# Altium PCB PCB.PcbDoc
Units mil, origin at the board's own origin, x right, y up, seen from the top; angles counter-clockwise.
Board outline 1729.33 x 890.25 mil, 2 copper layers (Top Layer, Bottom Layer); 14 components, 15 nets, 45 pads, 0 vias.
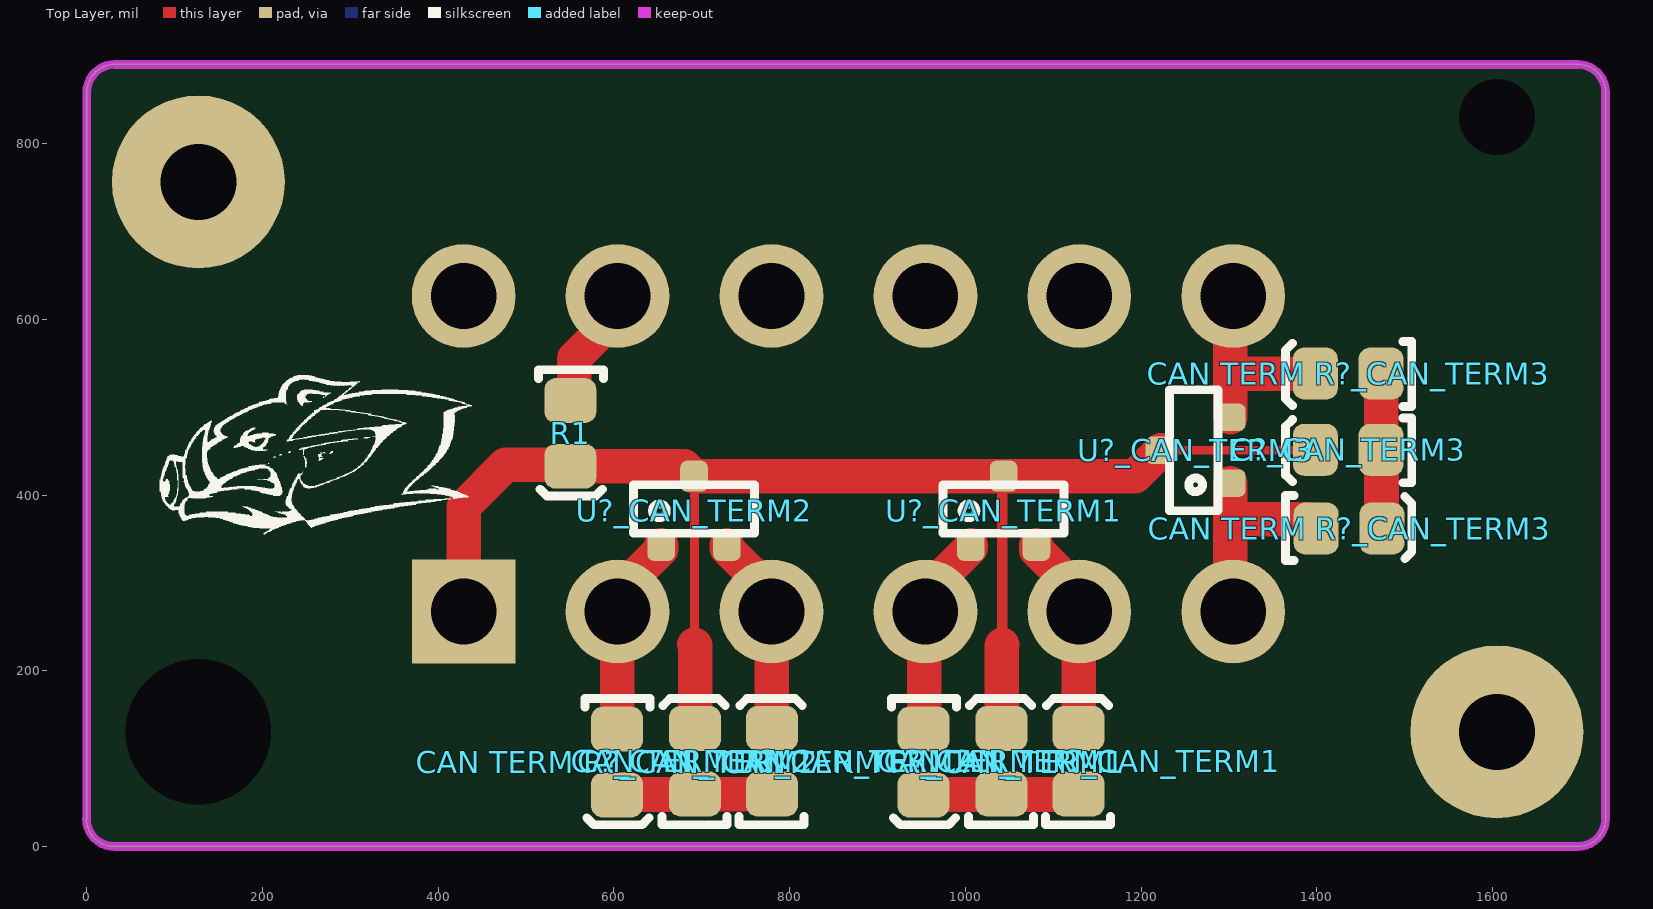
[diagram p0: Top Layer view]
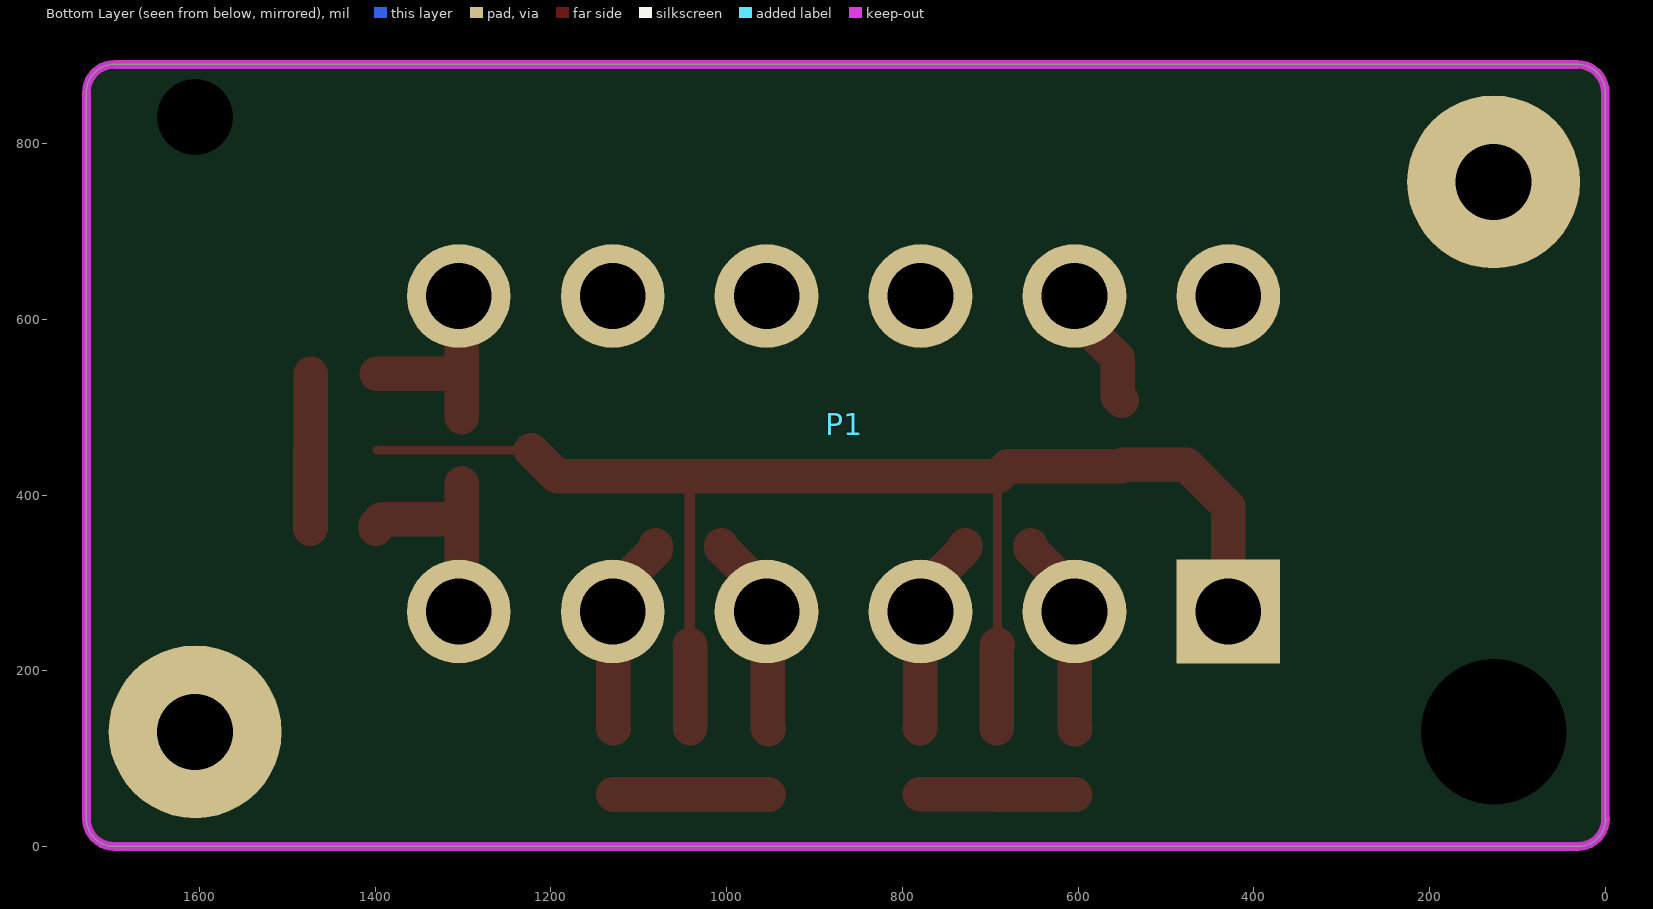
[diagram p1: Bottom Layer view, seen from below]
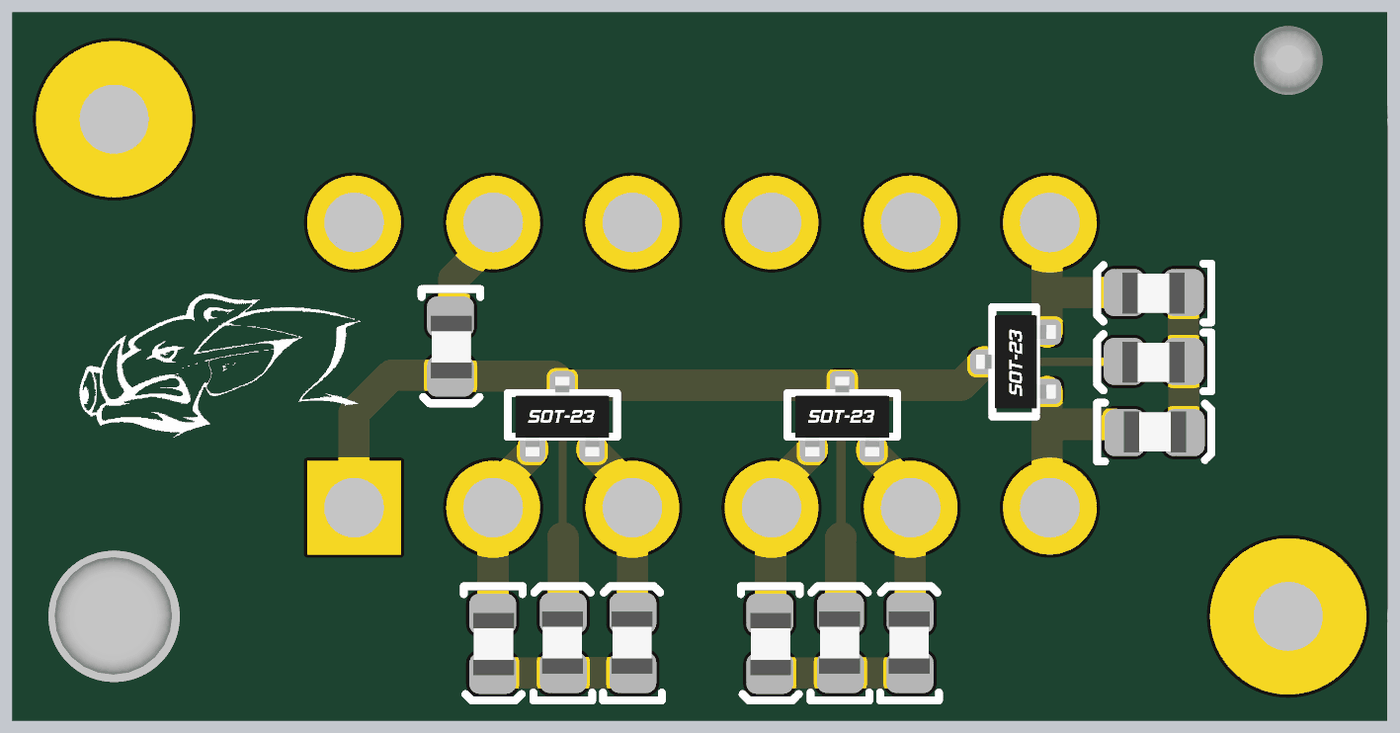
[diagram p2: 3D render of the assembled board from above, using the file's embedded part models]

## Layer stack, top to bottom
Top Solder: solder mask 0.4, Solder Resist, Dk 3.5
Top Layer: signal copper 1.4
Dielectric 1: dielectric 12.6, FR-4, Dk 4.8
Bottom Layer: signal copper 1.4
Bottom Solder: solder mask 0.4, Solder Resist, Dk 3.5

## Board outline
31.25,0 cw(c31.25,31.74) -0.49,31.74 0,31.25 0,858.51 cw(c31.74,858.51) 31.74,890.25 1697.1,890.25 cw(c1697.1,858.51) 1728.84,858.51 1728.84,31.74 cw(c1697.1,31.74) 1697.1,0

## Design rules (kind name [scope] priority, off if disabled: settings)
Clearance [All] p1: gap=10 ignorepadtopadclearanceinfootprint=FALSE except(0: Arc-Hole Track-Hole SMDPad-Hole THPad-Hole Via-Hole Fill-Hole Poly-Hole Region-Hole Text-Hole)
Height [All] p1: minheight=0 maxheight=10000 prefheight=500
PolygonConnect [All] p1: connectstyle=Relief reliefconductorwidth=10 reliefentries=4 polygonreliefangle="90 Angle" airgapwidth=10
RoutingVias [All] p1: holewidth=28 width=50 viastyle="Through Hole" minholewidth=28 minwidth=50 maxholewidth=28 maxwidth=50
SolderMaskExpansion [All] p1: expansion=4 istentingtop=FALSE
Width [All] p1: maxlimit=196.85 minlimit=10 preferedwidth=39.37 minimp=50.000000 maximp=50.000000 favimp=50.000000
29 further rules are at their usual default settings.

## Classes and differential pairs
channel class Termination: CAN_TERM1 CAN_TERM2 CAN_TERM3
component class Top_Level: P1 R1
component class CAN_TERM3: C?_CAN_TERM3 "CAN TERM R?_CAN_TERM3"
component class CAN_TERM2: C?_CAN_TERM2 "CAN TERM R?_CAN_TERM2" U?_CAN_TERM2
component class CAN_TERM1: C?_CAN_TERM1 "CAN TERM R?_CAN_TERM1" U?_CAN_TERM1

## Components (designator, comment, footprint, x,y, rotation, side; value= is the part's Value field where it differs from the comment)
C?_CAN_TERM1 "22nF" 0805 1040.2,97.51 r90 top (schematic designator C?)
C?_CAN_TERM2 "22nF" 0805 691.33,97.51 r90 top (schematic designator C?)
C?_CAN_TERM3 "22nF" 0805 1435.35,450.48 r180 top (schematic designator C?)
"CAN TERM R?_CAN_TERM1" "56R" 0805 1127.8,97.51 r90 top (schematic designator "CAN TERM R?")
"CAN TERM R?_CAN_TERM1" "56R" 0805 953.43,95.6 r270 top (schematic designator "CAN TERM R?")
"CAN TERM R?_CAN_TERM2" "56R" 0805 604.56,95.6 r270 top (schematic designator "CAN TERM R?")
"CAN TERM R?_CAN_TERM2" "56R" 0805 778.93,97.51 r90 top (schematic designator "CAN TERM R?")
"CAN TERM R?_CAN_TERM3" "56R" 0805 1435.35,537.25 r180 top (schematic designator "CAN TERM R?")
"CAN TERM R?_CAN_TERM3" "56R" 0805 1437.25,362.88 r0 top (schematic designator "CAN TERM R?")
P1 "DTF15-12P" DTF15-12P 428.95,985.52 r0 bottom locked
R1 "0R" 0805 551.43,469.73 r270 top
U?_CAN_TERM1 "NUP2105L" "ON SOT-23" 1043.55,382.13 r0 top (schematic designator U?)
U?_CAN_TERM2 "NUP2105L" "ON SOT-23" 691.19,382.13 r0 top (schematic designator U?)
U?_CAN_TERM3 "NUP2105L" "ON SOT-23" 1262.06,451.03 r90 top (schematic designator U?)

## Footprints (in the part's own frame and the unit in brackets; to place one, negate y for a bottom-side part, rotate by r counter-clockwise, add the part's x,y. Pads: shape width x height; smd on the part's side, far side on the other; paste and mask are expansions set on the pad)
0805 [mil]
  rrect50% 51.18x59.06 smd: 1(-37.87,-1.03) 2(36.93,-1.03)
  silkscreen extent -73,-37 71,37, body extent -39,-26 39,26, height 29
DTF15-12P [mm]
  rect 3x3 hole 1.9: 1(0,18.24)
  round 3 hole 1.9: 2(4.45,18.24) 3(8.9,18.24) 4(13.35,18.24) 5(17.8,18.24) 6(22.25,18.24) 7(22.25,9.12) 8(17.8,9.12) 9(13.35,9.12) 10(8.9,9.12) 11(4.45,9.12) 12(0,9.12)
  round 1.524 hole 4.2 unplated mask+0: 5(-7.671,21.717)
  round 1.524 hole 2.2 unplated mask+0: 5(29.87,3.937)
  body extent -10.87,2.62 33.07,24.88, height 35
"ON SOT-23" [mm] "NUP2105L"
  rrect50% 0.8x0.9 smd: 1(-0.95,-1) 2(0.95,-1) 3(0,1)
  silkscreen extent -1.75,-0.65 1.75,0.75, body extent -1.5,-1.28 1.5,1.27, height 1

## Part data
C?_CAN_TERM1 C?_CAN_TERM2 C?_CAN_TERM3: library part GCM21B5C1H223JA16L, Digikey Part Number=490-5318-1-ND, Manufacturer=muRata, Rated Voltage=50V, Tolerance=±5%, Material="C0G, NP0", Part Number=GCM21B5C1H223JA16L
"CAN TERM R?_CAN_TERM1" "CAN TERM R?_CAN_TERM1" "CAN TERM R?_CAN_TERM2" "CAN TERM R?_CAN_TERM2" "CAN TERM R?_CAN_TERM3" "CAN TERM R?_CAN_TERM3": library part RC0805FR0756RL, Digikey Part Number=311-56.0CRCT-ND, Manufacturer=YAGEO, Rated Voltage=0.125W, Tolerance=0.01, Material=FR-07, Part Number=RC0805FR0756RL
P1: library part DTF15-12P[[/\]]DTF15-12P, Digikey Part Number=1734-1647-ND, Angle=0, Contact="Copper Alloy", Digikey Link=https://www.digikey.com.au/product-detail/en/te-connectivity-deutsch-connectors/DTF15-12PA/1734-1647-ND/7220164, Flange=No, Part Number=DTF15-12P, Pitch=4.44mm, Positions=12, Row Spacing="9.12 mm"
R1: library part RC0805FR070RL, "DNP", Digikey Part Number=311-0.0CRCT-ND, Manufacturer=YAGEO, Rated Voltage=0.125W, Tolerance=0.01, Material=FR-07, Part Number=RC0805FR070RL
U?_CAN_TERM1 U?_CAN_TERM2 U?_CAN_TERM3: "Dual Line CAN Bus Protector", Digikey Part Number=NUP2105LT1GOSCT-ND, Manufacturer="ON Semiconductor", Digikey Link=https://www.digikey.com/product-detail/en/on-semiconductor/NUP2105LT1G/NUP2105LT1GOSCT-ND/1485001, Part Number=NUP2105L

## Free pads (board coordinates)
  round 196.85 hole 86.61: 2(126.95,756.5) 2(1604.95,130.52)

## Nets (pads, with @x,y where several pads share a name; then routed paths per layer and width w, separated by ;. In a path a pad name is that pad's centre, name@x,y a point inside that pad or via, vN(x,y) a via of type N, cw(c..) or ccw(c..) an arc to the next point about the centre after c; other vN are vias at no path point)
5kW: P1.8
CAN1H: "CAN TERM R?_CAN_TERM1.2"@1128.83,134.43 P1.5@1129.73,267.41 U?_CAN_TERM1.2 | length 228.9
  Top Layer w39.37: U?_CAN_TERM1.2 1080.95,337.5 1129.73,288.72 1129.73,267.41 1129.28,266.96 1129.28,134.88 1128.83,134.43
CAN1L: "CAN TERM R?_CAN_TERM1.1"@952.4,133.47 P1.4 U?_CAN_TERM1.1 | length 231.6
  Top Layer w39.37: 952.4,133.47 953.47,134.54 953.47,266.34 P1.4 954.54,288.72 1006.15,340.33 U?_CAN_TERM1.1
CAN2H: "CAN TERM R?_CAN_TERM2.2"@779.96,134.43 P1.3 U?_CAN_TERM2.2 | length 229.6
  Top Layer w39.37: U?_CAN_TERM2.2 728.59,339.47 779.34,288.72 P1.3 779.65,267.1 779.65,134.74 779.96,134.43
CAN2L: "CAN TERM R?_CAN_TERM2.1"@603.52,133.47 P1.2 U?_CAN_TERM2.1 | length 230.1
  Top Layer w39.37: 603.52,133.47 603.83,133.78 603.83,267.1 P1.2 604.14,288.72 653.79,338.36 U?_CAN_TERM2.1
CAN3H: "CAN TERM R?_CAN_TERM3.2"@1398.42,538.28 P1.7 U?_CAN_TERM3.2 | length 237
  Top Layer w39.37: U?_CAN_TERM3.2 1301.43,539.62 ; P1.7 1301.43,622.96 1301.43,539.62 ; 1398.42,538.28 1302.76,538.28 1301.43,539.62
CAN3L: "CAN TERM R?_CAN_TERM3.1"@1399.38,361.85 P1.6 U?_CAN_TERM3.1 | length 252.3
  Top Layer w39.37: U?_CAN_TERM3.1 1301.43,372.29 ; P1.6 1301.43,270.91 1301.43,372.29 ; 1399.38,361.85 1399.38,365.79 1393.48,371.7 1389.54,371.7 1388.94,372.29 1301.43,372.29
CANS: C?_CAN_TERM1.2 C?_CAN_TERM2.2 C?_CAN_TERM3.2 P1.1 R1.2 U?_CAN_TERM1.3 U?_CAN_TERM2.3 U?_CAN_TERM3.3 | length 1703.4
  Top Layer w10: C?_CAN_TERM2.2@691.19,135.6 C?_CAN_TERM2.2 ; U?_CAN_TERM2.3 691.74,420.95 691.74,229.51 ; U?_CAN_TERM3.3 1397.94,451.03 C?_CAN_TERM3.2
  Top Layer w11.81: 1042.13,229.51 1042.13,420.09 U?_CAN_TERM1.3
  Top Layer w39.37: P1.1 428.95,386.62 476.62,434.3 548.9,434.3 R1.2 679.89,432.81 U?_CAN_TERM2.3 U?_CAN_TERM1.3 1193.16,421.5 U?_CAN_TERM3.3 ; 691.74,229.51 692.36,228.89 C?_CAN_TERM2.2 ; C?_CAN_TERM1.2 1041.24,228.61 1042.13,229.51
GLV+: P1.12
GLV-: P1.11 R1.1 | length 141.1
  Top Layer w39.37: R1.1 554.69,511.9 554.69,555.71 604.14,605.16 P1.11
"Green In": P1.10
"Green Out": P1.9
NetC?_CAN_TERM1_1: "CAN TERM R?_CAN_TERM1.1"@1128.83,59.63 "CAN TERM R?_CAN_TERM1.2"@952.4,58.67 C?_CAN_TERM1.1 | length 176.8
  Top Layer w39.37: 952.4,58.67 952.88,59.15 1128.35,59.15 1128.83,59.63
NetC?_CAN_TERM2_1: "CAN TERM R?_CAN_TERM2.1"@779.96,59.63 "CAN TERM R?_CAN_TERM2.2"@603.52,58.67 C?_CAN_TERM2.1 | length 176.8
  Top Layer w39.37: 603.52,58.67 604.01,59.15 691.88,59.15 C?_CAN_TERM2.1 779.96,59.63
NetC?_CAN_TERM3_1: "CAN TERM R?_CAN_TERM3.1"@1473.22,538.28 "CAN TERM R?_CAN_TERM3.2"@1474.18,361.85 C?_CAN_TERM3.1 | length 176.8
  Top Layer w39.37: 1473.22,538.28 C?_CAN_TERM3.1 1473.7,451.03 1473.7,362.33 1474.18,361.85
pads on no net: P1.5@126.95,130.52 P1.5@1604.95,830.52

## Keep-outs
Keep-Out Layer:
  lines w10: -0.49,31.74 ccw(c31.25,31.74) 31.25,0 1697.1,0 ccw(c1697.1,31.74) 1728.84,31.74 1728.84,858.51 ccw(c1697.1,858.51) 1697.1,890.25 31.74,890.25 ccw(c31.74,858.51) 0,858.51 0,31.25

## Silkscreen, mask and mechanical layers (free items; w line width, h text height)
Top Overlay:
  drawing of 19 lines, arcs and shapes, not listed
Drill Drawing:
  circle w10: c197.19,3151.52 r22.44
  lines w10: 174.75,2826.16 219.63,2826.16 219.63,2871.03 174.75,2871.03 174.75,2826.16 ; 174.75,2927.13 197.19,2938.35 219.63,2927.13 208.41,2949.57 219.63,2972.01 197.19,2960.79 174.75,2972.01 185.97,2949.57 174.75,2927.13 ; 174.75,3072.98 219.63,3072.98 197.19,3028.11 174.75,3072.98
  lines w15: 133.48,2795.87 7460.24,2795.87 ; 133.48,3199.76 7460.24,3199.76 ; 514.77,2694.89 514.77,3300.73 ; 877.99,2694.89 877.99,3300.73 ; 1658.43,2694.89 1658.43,3300.73 ; 2009.42,2694.89 2009.42,3300.73 ; 2513.85,2694.89 2513.85,3300.73 ; 3529.82,2694.89 3529.82,3300.73 ; 3937.34,2694.89 3937.34,3300.73 ; 4449.84,2694.89 4449.84,3300.73 ; 5028.4,2694.89 5028.4,3300.73 ; 5613.57,2694.89 5613.57,3300.73 ; 6521.76,2694.89 6521.76,3300.73 ; 133.48,2694.89 7460.24,2694.89 7460.24,3300.73 133.48,3300.73 133.48,2694.89
  text "Symbol" at 194.07,3230.05 h48.47
  text "Count" at 545.06,3230.05 h48.47
  text "Hole Size" at 908.28,3230.05 h48.47
  text "Plated" at 1688.72,3230.05 h48.47
  text "Hole Type" at 2039.72,3230.05 h48.47
  text "Drill Layer Pair" at 2544.14,3230.05 h48.47
  text "Via/Pad" at 3560.11,3230.05 h48.47
  text "Pad Shape" at 3967.63,3230.05 h48.47
  text "Template" at 4480.13,3230.05 h48.47
  text "Description" at 5058.69,3230.05 h48.47
  text "Hole Tolerance (+)" at 5643.87,3230.05 h48.47
  text "Hole Tolerance (-)" at 6552.05,3230.05 h48.47
  text "1" at 545.06,3129.08 h40.39
  text "86.61mil (2.200mm)" at 908.28,3129.08 h40.39
  text "NPTH" at 1688.72,3129.08 h40.39
  text "Round" at 2039.72,3129.08 h40.39
  text "Top Layer - Bottom Layer" at 2544.14,3129.08 h40.39
  text "Pad" at 3560.11,3129.08 h40.39
  text "Rounded" at 3967.63,3129.08 h40.39
  text "c152hn220m152" at 4480.13,3129.08 h40.39
  text "1" at 545.06,3028.11 h40.39
  text "165.35mil (4.200mm)" at 908.28,3028.11 h40.39
  text "NPTH" at 1688.72,3028.11 h40.39
  text "Round" at 2039.72,3028.11 h40.39
  text "Top Layer - Bottom Layer" at 2544.14,3028.11 h40.39
  text "Pad" at 3560.11,3028.11 h40.39
  text "Rounded" at 3967.63,3028.11 h40.39
  text "c152hn420m152" at 4480.13,3028.11 h40.39
  text "2" at 545.06,2927.13 h40.39
  text "86.61mil (2.200mm)" at 908.28,2927.13 h40.39
  text "PTH" at 1688.72,2927.13 h40.39
  text "Round" at 2039.72,2927.13 h40.39
  text "Top Layer - Bottom Layer" at 2544.14,2927.13 h40.39
  text "Pad" at 3560.11,2927.13 h40.39
  text "Rounded" at 3967.63,2927.13 h40.39
  text "c500h220" at 4480.13,2927.13 h40.39
  text "12" at 545.06,2826.16 h40.39
  text "74.80mil (1.900mm)" at 908.28,2826.16 h40.39
  text "PTH" at 1688.72,2826.16 h40.39
  text "Round" at 2039.72,2826.16 h40.39
  text "Top Layer - Bottom Layer" at 2544.14,2826.16 h40.39
  text "Pad" at 3560.11,2826.16 h40.39
  text "(Mixed)" at 3967.63,2826.16 h40.39
  text "(Mixed)" at 4480.13,2826.16 h40.39
  text "16 Total" at 545.06,2725.18 h40.39
  text "FABRICATION NOTES" at 2249.06,2417.75 h118.11
  text "1. QUANTITY: 5" at 2249.06,2217.11 h118.11
  text "2. SIZE:  22.61mm x 43.91mm" at 2249.06,2016.46 h118.11
  text "3. LAYERS: 2" at 2249.06,1815.81 h118.11
  text "4. SIGNAL LAYERS: 1,2" at 2249.06,1654.53 h118.11
  text "a) WEIGHT: 1oz" at 2445.91,1414.52 h118.11
  text "5. PLANES:" at 2249.06,1213.88 h118.11
  text "a) WEIGHT:" at 2445.91,1013.23 h118.11
  text "6. SOLDER MASKS: Green" at 2249.06,812.58 h118.11
  text "7. SILKSCREEN: White" at 2249.06,611.94 h118.11
  text "8. SURFACE FINISH: HASL (With Lead)" at 2249.06,411.29 h118.11
  text "9 FINISHED COPPER: 1oz Cu" at 2249.06,210.65 h118.11
  text "10. TOTAL THICKNESS: 1.6mm" at 2249.06,10 h118.11

## Dimensions
1728.84,858.51 to 0,858.51 on Drill Drawing
1697.1,890.25 to 1697.1,0 on Drill Drawing